# Altium PCB UWB_CAN.PcbDoc
Units mm, origin at the board's own origin, x right, y up, seen from the top; angles counter-clockwise.
Board outline 22.83 x 42.18 mm, 2 copper layers (Component Side, Solder Side), stack 1.071 mm thick; 41 components, 37 nets, 179 pads, 180 vias.
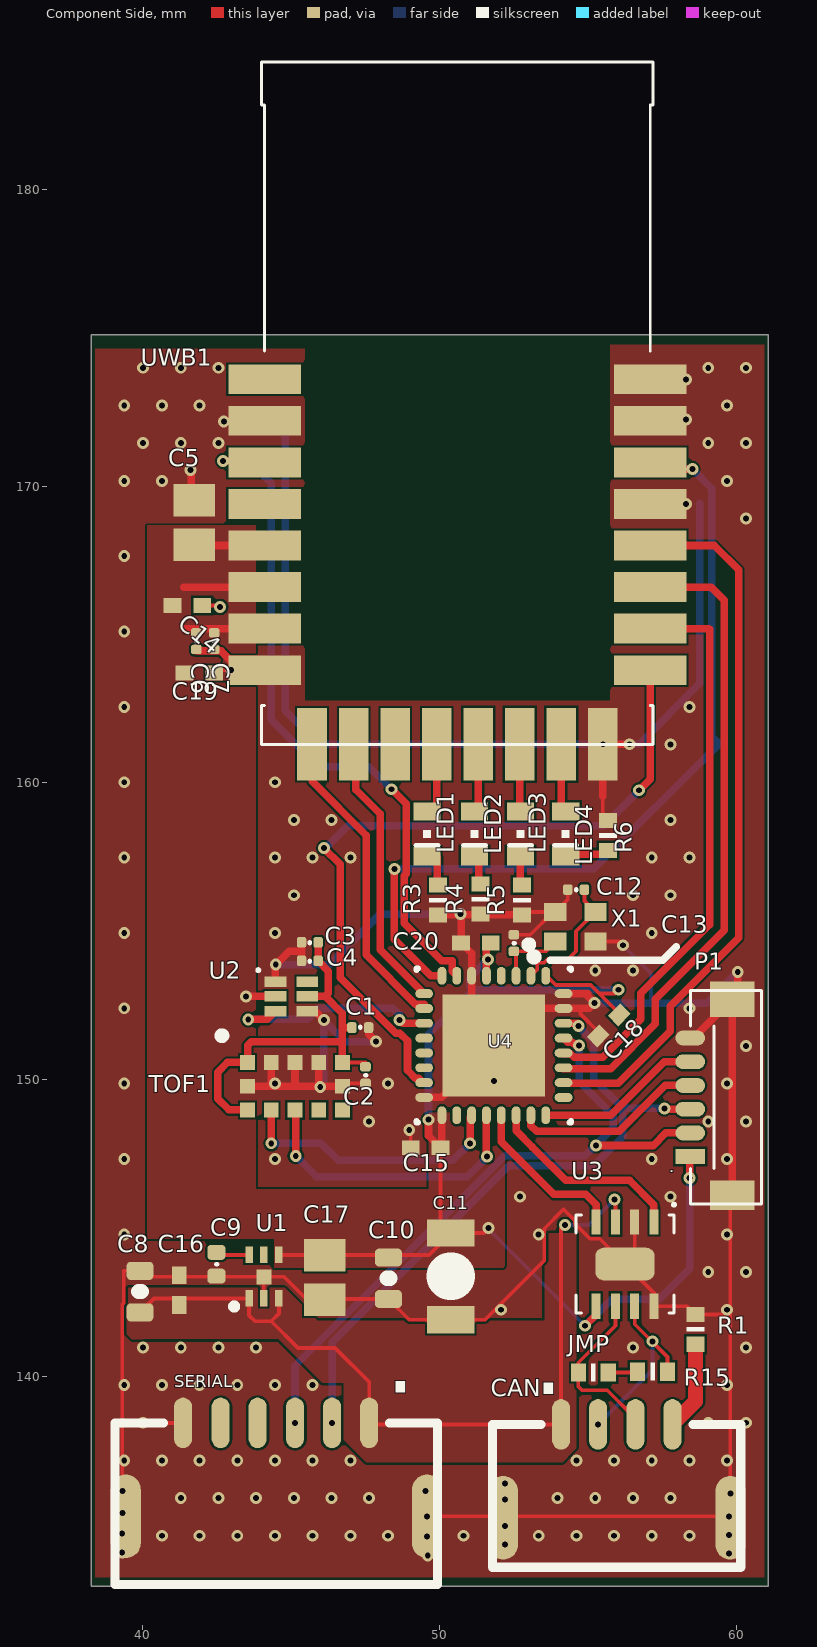
[diagram p0: Component Side view]
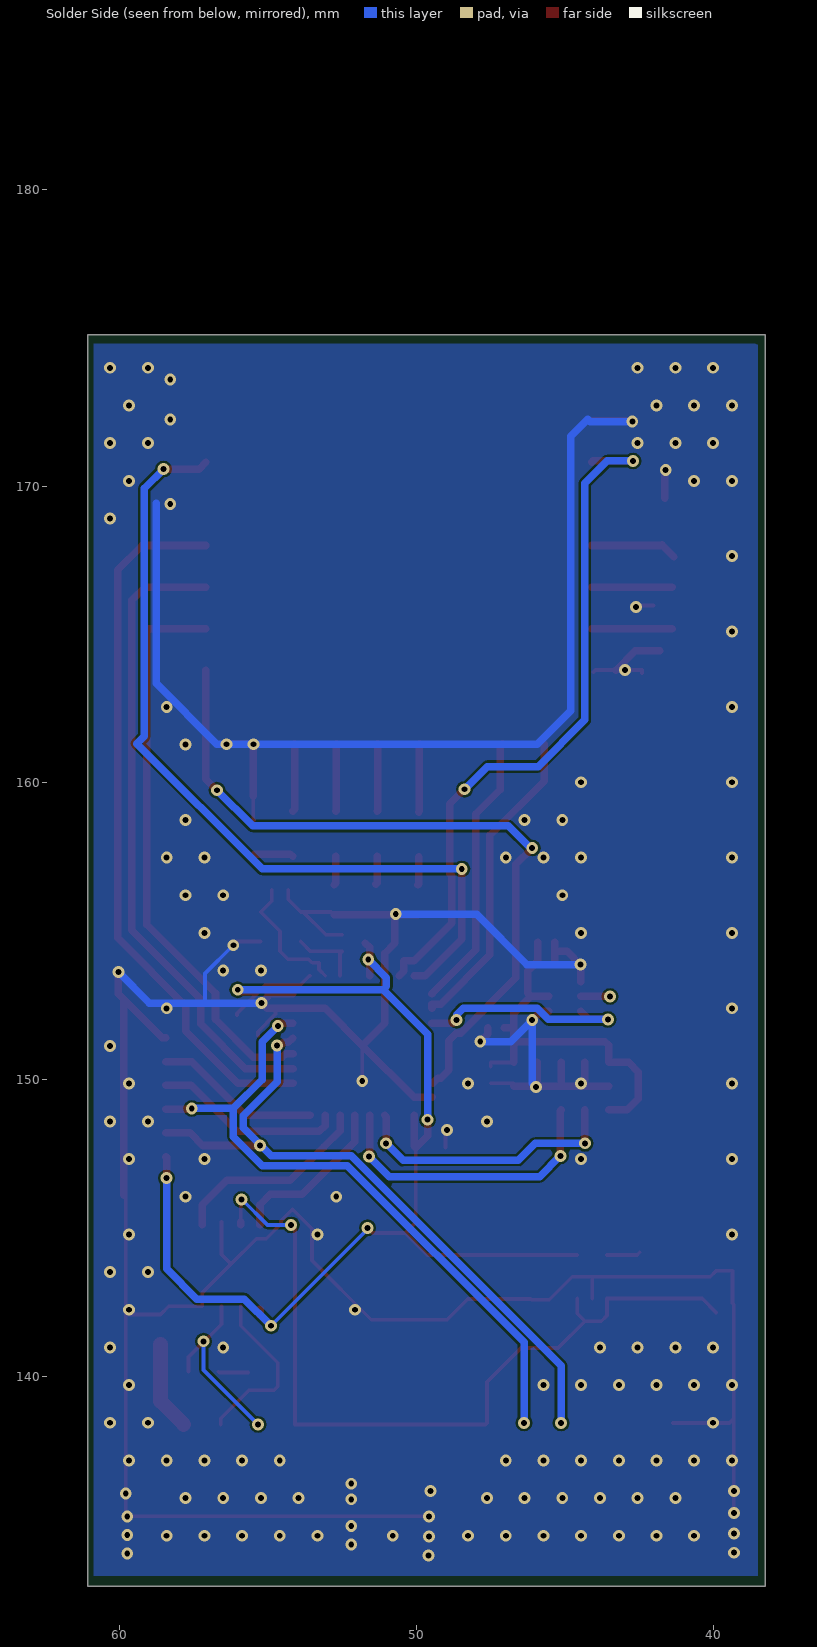
[diagram p1: Solder Side view, seen from below]
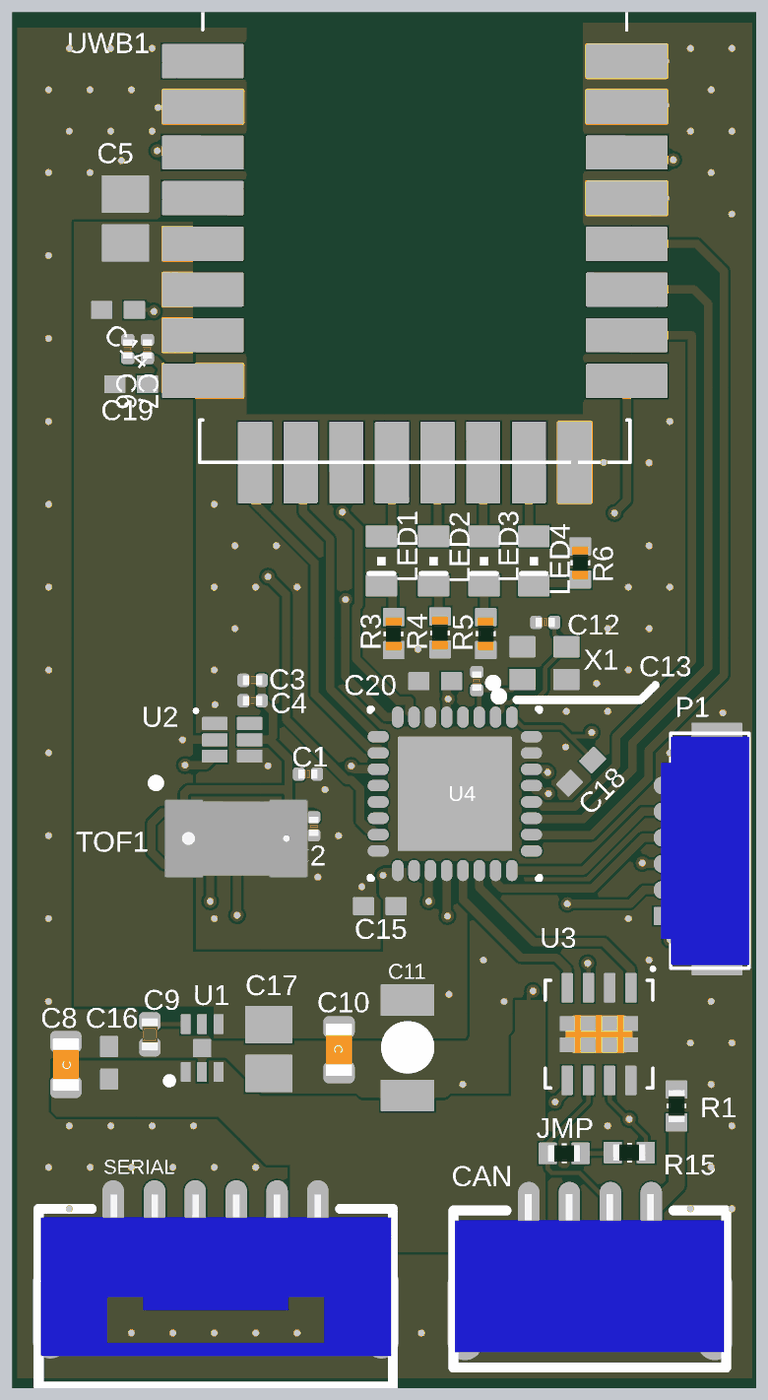
[diagram p2: 3D render of the assembled board from above, using the file's embedded part models]

## Layer stack, top to bottom
Top Solder: solder mask 0.0102, Solder Resist, Dk 3.5
Component Side: signal copper 0.0356
Dielectric 1: core 1, FR-4, Dk 4.2
Solder Side: signal copper 0.0356
Bottom Solder: solder mask 0.0102, Solder Resist, Dk 3.5

## Board outline
38.25,132.925 61.075,132.925 61.075,175.1 38.25,175.1

## Design rules (kind name [scope] priority, off if disabled: settings)
Clearance Clearance_1 [All] p1: gap=0.076 ignorepadtopadclearanceinfootprint=FALSE
Clearance mdPadVia [IsPad vs IsVia] p2 off: gap=0.15 ignorepadtopadclearanceinfootprint=FALSE except(0: Arc-Hole Track-Hole SMDPad-Hole THPad-Hole Via-Hole Fill-Hole Poly-Hole Region-Hole Text-Hole)
ComponentClearance ComponentClearance_1 [All] p1 off: gap=0 collisioncheckmode=3 verticalgap=0 showdistances=FALSE
DiffPairsRouting [All] p1: maxlimit=0.254 minlimit=0.254 mostfreqgap=0.254 toplayer_minwidth=0.15 toplayer_maxwidth=0.381 toplayer_prefwidth=0.15 bottomlayer_minwidth=0.15 bottomlayer_maxwidth=0.381 bottomlayer_prefwidth=0.15 maxuncoupledlength=12.7
HoleToHoleClearance [All] p1: gap=0.203 allowstackedmicrovias=TRUE
MatchedLengths [All] p1 off: tolerance=25.4 checknetsindiffpair=FALSE checkdiffpairvsdiffpair=TRUE checkxsignals=TRUE checkothers=TRUE
MinimumSolderMaskSliver [All] p1 off: minsoldermaskwidth=0.254
PasteMaskExpansion [All] p1: expansion=0.025
PolygonConnect ThermalVias [IsVia] p1: connectstyle=Direct reliefconductorwidth=0.254 reliefentries=4 polygonreliefangle="90 Angle" airgapwidth=0.254
PolygonConnect [All] p2: connectstyle=Direct reliefconductorwidth=0.254 reliefentries=4 polygonreliefangle="90 Angle" airgapwidth=0.254
RoutingVias 1-2 [InDrillLayerPair('Component Side - Signal Layer 1')] p1: holewidth=0.1 width=0.2 viastyle="Through Hole" minholewidth=0.1 minwidth=0.2 maxholewidth=0.1 maxwidth=0.2
RoutingVias 2-3 [InDrillLayerPair('Signal Layer 1 - Signal Layer 2')] p2: holewidth=0.1 width=0.2 viastyle="Through Hole" minholewidth=0.1 minwidth=0.2 maxholewidth=0.1 maxwidth=0.2
RoutingVias 3-4 [InDrillLayerPair('Signal Layer 2 - Solder Side')] p3: holewidth=0.1 width=0.2 viastyle="Through Hole" minholewidth=0.1 minwidth=0.2 maxholewidth=0.1 maxwidth=0.2
RoutingVias 1-4 [InDrillLayerPair('Component Side - Solder Side')] p4: holewidth=0.2 width=0.4 viastyle="Through Hole" minholewidth=0.2 minwidth=0.4 maxholewidth=0.2 maxwidth=0.4
SMDNeckDown SMDNeckDown1V8 [InNet('1V8')] p1 off: percent=70.000
SMDNeckDown SMDNeckDown2V8 [InNet('2V8')] p2 off: percent=70.000
SMDNeckDown 5VNeckdown [All] p3 off: percent=100.000
ShortCircuit normal_no_shorts [InPadClass('All Pads')] p1: allowed=FALSE
SilkToBoardRegionClearance [All] p1 off:
SilkToSilkClearance [All] p1 off: silktosilkclearance=0.254
SilkToSolderMaskClearance [IsPad] p1 off: minsilkscreentomaskgap=0.001 clearancetoexposedcopper=TRUE
SolderMaskExpansion [All] p1: expansion=0.025
Width 2V8 [InNet('1V8')] p1: maxlimit=0.254 minlimit=0.124 preferedwidth=0.254
Width 5V [InNet('Net3_1')] p2: maxlimit=0.254 minlimit=0.087 preferedwidth=0.254
Width 1V8 [InNet('2V8')] p3: maxlimit=0.254 minlimit=0.124 preferedwidth=0.254
Width [All] p4: maxlimit=0.5 minlimit=0.127 preferedwidth=0.254
21 further rules are at their usual default settings.

## Classes and differential pairs
component class U_UWB_F3_MCU: C1_2 C2_2 C3_2 C12 C13 C14 C15 C17 C18 C19 C20 ICM-1_2 P1 U4 X1
component class U_OMD_TOF: C1 C2 C3 C4 TOF1 U2
component class U_OMD_UWB: C5 C6 C7 LED1 LED2 LED3 LED4 R3 R4 R5 R6 UWB1
component class UWB_F3_CAN_UWB_layout: SERIAL
component class U_UWB_5V-3V3_LDO: C8 C9 C10 C11 U1
component class U_OMD_CAN: C16 CAN JMP R1 R15 U3

## Components (designator, comment, footprint, x,y, rotation, side; value= is the part's Value field where it differs from the comment)
C1 "22uF" 0201-cap 47.325,151.75 r0 top
C2 "4u7" 0201-cap 47.5,150.15 r270 top
C3 "1u" 0201-cap 45.625,154.625 r180 top
C4 "0u1" 0201-cap 45.625,154 r180 top
C5 "GRM21BR60G107ME15L" C0805 41.725,168.775 r270 top value=100uF
C6 "1u" 0201-cap 41.8,164.775 r270 top
C7 "0u1" 0201-cap 42.4,164.775 r270 top
C8 "1u" 0603-CAP 39.9,142.85 r90 top
C9 "0.1u" 0402-CAP 42.475,143.775 r270 top
C10 "1u" 0603-CAP 48.275,143.3 r270 top
C11 "100u" 1206-CAP 50.375,143.375 r270 top
C12 "8p" 0201-cap 54.6,156.4 r180 top
C13 "8p" 0201-cap 52.5,154.6 r270 top
C14 "CAP CER 10000PF 50V X7R 0402" CAPC1005L 41.5,165.975 r180 top value=10nF
C15 "Cap" CAPC1005L 49.525,147.7 r180 top value=1uF
C16 "Cap" CAPC1005L 41.225,142.9 r270 top value=1uF
C17 "Cap" CAPC2012L 46.125,143.325 r90 top value=22uF
C18 "CAP CER 10000PF 50V X7R 0402" CAPC1005L 55.7,151.825 r45 top value=10nF
C19 "CAP CER 10000PF 50V X7R 0402" CAPC1005L 41.9,163.7 r180 top value=10nF
C20 "CAP CER 10000PF 50V X7R 0402" CAPC1005L 51.225,154.6 r0 top value=10nF
CAN "JST_GH_H4" JST_GH_H4 55.975,132.925 r180 top
JMP "solder" R0402 55.175,140.125 r0 top
LED1 "AMBER" 0603-LED 49.575,158.275 r90 top
LED2 "AMBER" 0603-LED 51.175,158.275 r90 top
LED3 "AMBER" 0603-LED 52.725,158.275 r90 top
LED4 "AMBER" 0603-LED 54.25,158.275 r90 top
P1 "JST_SUR_6" JST_SUR_H6 60.45,149.4 r90 top
R1 "RES SMD 120 OHM 5% 1/16W 0402" R0402 58.625,141.575 r90 top value=120R
R3 "220R" 0402-RES 49.95,156.05 r90 top
R4 "220R" 0402-RES 51.375,156.075 r90 top
R5 "220R" 0402-RES 52.775,156.05 r90 top
R6 "220R" 0402-RES 55.675,158.225 r270 top
R15 "RES SMD 120 OHM 5% 1/16W 0402" R0402 57.175,140.15 r0 top value=120R
SERIAL "JST_GH_V6" JST_GH_V6 44.5,132.975 r180 top
TOF1 "VL53L0X" VL53L0X 45.125,149.775 r180 top
U1 "MIC5353" MLF-6-1.6MM 44.075,143.35 r0 top
U2 "NCV8154" NCV8154 45,152.8 r0 top
U3 "CAN" SON65P300X100_HS-9N 56.25,143.78 r270 top
U4 "IC MCU M4 64KB FLASH 32UFQFPN" QFN50P500X500X60-32L 51.828,151.145 r270 top
UWB1 "DWM1000" DWM1000 50.6,172.8 r0 top
X1 "Crystal Oscillator in SMD 1.6 x 1.2" OSCILLATOR-1.6x1.2 54.575,155.15 r0 top

## Footprints (in the part's own frame and the unit in brackets; to place one, negate y for a bottom-side part, rotate by r counter-clockwise, add the part's x,y. Pads: shape width x height; smd on the part's side, far side on the other; paste and mask are expansions set on the pad)
0201-cap [mm]
  rrect50% 0.32x0.36 smd mask+0: 1(-0.28,0) 2(0.28,0)
  silkscreen extent 0,-0.01 0,0.03, body extent -0.3,-0.15 0.3,0.15, height 0.3
0402-CAP [mil]
  rrect50% 20x24 smd mask+0: 1(-15.75,0) 2(15.75,0)
  silkscreen extent 0,0 0,1, body extent -20,-10 20,10, height 20
0402-RES [mil] "0402-RES"
  rect 20x24 smd: 1(-19.68,0) 2(20,0)
  silkscreen extent -3,-12 3,12, body extent -20,-10 20,10, height 20
0603-CAP [mil] "0603-CAP"
  rrect50% 24x36 smd mask+0: 1(-27.56,0) 2(27.56,0)
  silkscreen extent 0,-2 0,2, body extent -31,-16 31,16, height 34
0603-LED [mil]
  rect 24x36 smd: A(30,0) C(-29.53,0)
  silkscreen extent -15,-15 5,15
1206-CAP [mil] "1206-CAP"
  rect 36x63 smd: 1(-57.09,0) 2(58,0)
  silkscreen extent 0,0 0,1
C0805 [mm] "Chip Capacitor, Body 2.0x1.3mm, IPC High Density"
  rect 1.1x1.4 smd: 1(-0.75,0) 2(0.75,0)
  body extent -1.1,-0.72 1.1,0.72, height 1.4
CAPC1005L [mm] "Chip Capacitor, Body 1.0x0.5mm, IPC High Density"
  rect 0.6x0.5 smd: 1(-0.5,0) 2(0.5,0)
  body extent -0.55,-0.3 0.55,0.3, height 0.6
CAPC2012L [mm] "Chip Capacitor, Body 2.0x1.3mm, IPC High Density"
  rect 1.1x1.4 smd: 1(-0.75,0) 2(0.75,0)
  body extent -1.1,-0.73 1.1,0.73, height 1.1
DWM1000 [mm] "DWM1000"
  rect 2.45x1 smd mask+0.05: 1(-6.5,0.8) 2(-6.5,-0.6) 3(-6.5,-2) 4(-6.5,-3.4) 5(-6.5,-4.8) 6(-6.5,-6.2) 7(-6.5,-7.6) 8(-6.5,-9) 17(6.5,-9) 18(6.5,-7.6) 19(6.5,-6.2) 20(6.5,-4.8) 21(6.5,-3.4) 22(6.5,-2) 23(6.5,-0.6) 24(6.5,0.8)
  rect 1x2.45 smd mask+0.05: 9(-4.9,-11.5) 10(-3.5,-11.5) 11(-2.1,-11.5) 12(-0.7,-11.5) 13(0.7,-11.5) 14(2.1,-11.5) 15(3.5,-11.5) 16(4.9,-11.5)
  silkscreen extent -6.6,-11.5 6.6,11.5
JST_GH_H4 [mil]
  rrect100% 24x67 smd: 1(74,-214.57) 2(25,-214.57) 3(-24.61,-214.57) 4(-73.82,-214.57)
  rrect100% 40x111 smd: GND(-150.59,-90.55) GND(151,-90.55)
  silkscreen extent -164,-215 165,-25, body extent -162,-234 163,-43, height 170
JST_GH_V6 [mil]
  rrect100% 24x67 smd: 1(-123.03,-214.57) 2(-73.82,-214.57) 3(-24.61,-214.57) 4(25,-214.57) 5(74,-214.57) 6(124,-214.57)
  rrect100% 40x111 smd: GND(-199.8,-90.55) GND(200,-90.55)
  silkscreen extent -214,-215 214,0, body extent -212,-232 212,-37, height 165
JST_SUR_H6 [mm]
  rect 0.5x1 smd: 1(-2,2)
  rrect100% 0.5x1 smd: 2(-1.2,2) 3(-0.4,2) 4(0.4,2) 5(1.2,2) 6(2,2)
  rect 1x1.5 smd: GND(-3.3,0.585)
  rect 1.2x1.5 smd: GND(3.3,0.585)
  silkscreen extent -3.6,-0.4 3.6,2, body extent -3.5,-0.4 3.5,2.3, height 1.7
MLF-6-1.6MM [mil] "MLF-6-1.6MM"
  rect 10x22 smd: 1(-19.69,-28.74) 2(0,-28.74) 3(20,-28.74) 4(20,29) 5(0,29) 6(-19.68,29)
  rect 20x20 smd: 2(0,0)
  silkscreen extent -41,-41 -37,-37
NCV8154 [mm] "ldo 1.8v 2.8v"
  rect 0.73x0.35 smd: 1(-0.535,0.5) 2(-0.535,0) 3(-0.535,-0.5) 4(0.535,-0.5) 5(0.535,0) 6(0.535,0.5)
  silkscreen extent -1.16,0.84 -1.06,0.94
OSCILLATOR-1.6x1.2 [mm] "OSCILLATOR-1.6x1.2"
  rect 0.75x0.6 smd: 1(-0.675,-0.5) 2(0.675,-0.5) 3(0.675,0.5) 4(-0.675,0.5)
  silkscreen extent -1.5,-1.12 -1.3,-0.91
QFN50P500X500X60-32L [mm] "QFN, 32-Leads, Body 5.2x5.2mm (max), Pitch 0.50mm, IPC High Density"
  oval 0.6x0.3 smd: 1(-2.35,1.75) 2(-2.35,1.25) 3(-2.35,0.75) 4(-2.35,0.25) 5(-2.35,-0.25) 6(-2.35,-0.75) 7(-2.35,-1.25) 8(-2.35,-1.75) 17(2.35,-1.75) 18(2.35,-1.25) 19(2.35,-0.75) 20(2.35,-0.25) 21(2.35,0.25) 22(2.35,0.75) 23(2.35,1.25) 24(2.35,1.75)
  oval 0.3x0.6 smd: 9(-1.75,-2.35) 10(-1.25,-2.35) 11(-0.75,-2.35) 12(-0.25,-2.35) 13(0.25,-2.35) 14(0.75,-2.35) 15(1.25,-2.35) 16(1.75,-2.35) 25(1.75,2.35) 26(1.25,2.35) 27(0.75,2.35) 28(0.25,2.35) 29(-0.25,2.35) 30(-0.75,2.35) 31(-1.25,2.35) 32(-1.75,2.35)
  rect 3.45x3.45 smd: 33(0,0)
  silkscreen extent -3.52,-2.6 2.6,2.6, body extent -2.58,-2.57 2.57,2.58, height 0.6
R0402 [mil]
  rect 20x24 smd: 1(-19.69,0) 2(20,0)
  silkscreen extent -3,-12 3,12, body extent -20,-10 20,10, height 12
SON65P300X100_HS-9N [mm] "SON, 8-Leads, Body 3.00x3.00mm, Pitch 0.65mm, Thermal Pad 2.40x1.59mm, IPC Medium Density"
  rect 0.85x0.3 smd: 1(-1.42,0.975) 2(-1.42,0.325) 3(-1.42,-0.325) 4(-1.42,-0.975) 5(1.42,-0.975) 6(1.42,-0.325) 7(1.42,0.325) 8(1.42,0.975)
  rrect50% 1.1x2 smd paste-0.795: 2(0,0)
  silkscreen extent -2.05,-1.65 1.65,1.7, body extent -1.55,-1.55 1.55,1.55, height 1
VL53L0X [mm] "LIDAR"
  rect 0.5x0.5 smd: 1(1.6,-0.8) 2(0.8,-0.8) 3(0,-0.8) 4(-0.8,-0.8) 5(-1.6,-0.8) 6(-1.6,0) 7(-1.6,0.8) 8(-0.8,0.8) 9(0,0.8) 10(0.8,0.8) 11(1.6,0.8) 12(1.6,0)
  silkscreen extent 2.34,-1.83 2.59,-1.58, body extent -2.2,-1.2 2.2,1.2, height 1

## Part data
C1: library part CAP0805, "CAP CER 22UF 6.3V X5R 0402", Supplier Part Number 1=478-9839-2-ND, Supplier 1=Digi-Key
C2: library part CAP0603, "CAP CER 4.7UF 6.3V X5R 0201", Supplier Part Number 1=490-13230-2-ND, Supplier 1=Digi-Key
C3 C6: library part CAP0603, "CAP CER 1UF 6.3V X5R 0201", Supplier Part Number 1=490-7229-2-ND, Supplier 1=Digi-Key
C4 C7: library part CAP0402, "CAP CER 0.1UF 16V Y5V 0402", Supplier Part Number 1=490-10404-2-ND, Supplier 1=Digi-Key
C5: library part Capacitor, Supplier Part Number 1=490-10510-1-ND, Supplier 1=Digi-Key
C8 C10: library part CAPACITOR-0603, PARTNO=LMK107B7105KA-T, Supplier Part Number 1=587-3766-1-ND, DOC_NUM=1, REV=X2, Supplier 1=Digi-Key, YEAR=2014
C9: library part CAPACITOR-0402, PARTNO=LMK105BJ104KV-F, Supplier Part Number 1=311-1047-2-ND, DOC_NUM=1, REV=X2, Supplier 1=Digi-Key, YEAR=2014
C11: library part CAPACITOR-1206, PARTNO=C3216X5R1A107M160AC, Supplier Part Number 1=445-6007-2-ND, DOC_NUM=1, REV=X2, Supplier 1=Digi-Key, YEAR=2014
C12 C13: library part CAP0402, "CAP CER 8PF 50V NP0 0201", Supplier Part Number 1=490-13331-1-ND, Supplier 1=Digi-Key
C14 C18 C19 C20: library part Cap, Supplier Part Number 1=445-6893-1-ND, Supplier 1=Digi-Key
C15 C16: "CAP CER 1UF 6.3V X5R 0402", Supplier Part Number 1=587-3766-1-ND, Supplier 1=Digi-Key
C17: "Capacitor", Supplier Part Number 1=587-3391-1-ND, Supplier 1=Digi-Key
CAN: "SM04B-GHS-TB", Supplier Part Number 1=455-1566-2-ND, Supplier 1=Digi-Key
JMP: library part Resistor
LED1 LED2 LED3 LED4: library part LED0603, "LED 1.6X0.8 DOME ORN CLEAR SMD", Supplier Part Number 1=754-1802-1-ND, Supplier 1=Digi-Key
P1: "Connector, Header, 6Pos, .8mm IDC, R/A, SMD, Tin", Supplier Part Number 1=SM06B-SURS-TF(LF)(SN)-ND, Supplier 1=Digi-Key
R1 R15: library part Resistor, Supplier Part Number 1=311-120JRTR-ND, Supplier 1=Digi-Key
R3 R4 R5 R6: library part RESISTOR0402-RES, "RES 220 OHM 1/16W 1% 0402 SMD", Supplier Part Number 1=311-220LRCT-ND, Supplier 1=Digi-Key
SERIAL: "BM06B-GHS-TBT", Supplier Part Number 1=455-1582-2-ND, Supplier 1=Digi-Key
TOF1: Supplier Part Number 1=497-16538-2-ND, Supplier 1=Digi-Key
U1: "MIC5353 - 500mA LDO in 1.6mm × 1.6mm Package   The MIC5353 is a high-performance, single-output, ultra- low LDO (ULDOTM) regulator, offering a low total output noise of 30µVRMS. The MIC5353 is capable of sourcing 500mA output current and offers high-PSRR and low- output noise, making it an ideal solution for RF applications.   The MIC5353 provides 2% accuracy, extremely low dropout voltage (160mV @ 500mA), and low ground current (typically 90µA) making it ideal for battery-operated applications. When disabled, the MIC5353 enters a zero- off-mode current state, thereby drawing almost no current.   The MIC5353 is available in the 1.6mm x 1.6mm Thin MLF® package, occupying only 2.56mm2 of PCB area, a 36% reduction in board area compared to SC-70 and 2mm x 2mm Thin MLF® packages.", Supplier Part Number 1=576-3680-1-ND, Supplier 1=Digi-Key
U2: "IC REG LDO 1.8v and 2.8v", Supplier Part Number 1=NCV8154MTW180280TCGOSTR-ND, Supplier 1=Digi-Key
U3: Supplier Part Number 1=568-8686-2-ND, Supplier 1=Digi-Key
U4: library part STM32F302K8U6, "72 MHz Cortex-M4F MCU with 16 KB RAM, 64 KB flash", Supplier Part Number 1=41Y5840, Supplier 1=Newark
UWB1: Supplier Part Number 1=1479-1002-2-ND, Supplier 1=Digi-Key
X1: library part OSCILLATOR-3.2X2.5, "CRYSTAL 24MHZ 8PF SMD", Supplier Part Number 1=887-1846-2-ND, Supplier 1=Digi-Key

## Via types
v1: diameter 0.4, hole 0.2, Component Side to Solder Side, tented both sides, 180 vias

## Nets (pads, with @x,y where several pads share a name; then routed paths per layer and width w, separated by ;. In a path a pad name is that pad's centre, name@x,y a point inside that pad or via, vN(x,y) a via of type N, cw(c..) or ccw(c..) an arc to the next point about the centre after c; other vN are vias at no path point)
GND_MCU: C1.2 C2.2 C3.2 C4.2 C5.1 C6.2 C7.2 C8.2 C9.2 C10.2 C11.2 C12.2 C13.1 C14.1 C15.2 C16.1 C17.1 C18.1 C19.1 C20.1 CAN.GND P1.6 P1.GND R1.2 R3.1 R4.1 R5.1 R6.1 SERIAL.6 SERIAL.GND TOF1.2 TOF1.3 TOF1.4 TOF1.6 TOF1.12 U1.2 U2.1 U2.4 U3.2 U3.8 U4.6 U4.16 U4.31 U4.32 U4.33 UWB1.2 UWB1.8 UWB1.16 UWB1.21 UWB1.23 UWB1.24 X1.2 X1.4 | length 164.5
  Component Side w0.127: SERIAL.GND@39.42,135.275 v1(39.303,135.392) v1(39.303,136.125) 39.303,138.575 ; SERIAL.6 39.453,138.425 39.303,138.575 ; C14.1 42.6,165.975 v1(42.6,165.925) ; C19.1 42.4,163.8 v1(42.975,163.8) 43.275,163.8 43.966,163.8 UWB1.8@44.033,163.733 ; U1.2@44.075,142.62 U1.2@44.075,143.35 ; TOF1.6 46.725,149.87 C2.2 ; v1(48.975,148.3) 49.025,148.3 C15.2 ; v1(49.575,135.275) v1(59.75,135.275) 59.8,135.225 v1(59.8,136.05) v1@59.8,142.1 ; v1(51.828,149.95) U4.33 ; C13.1 53.055,154.88 X1.4@53.825,155.65 ; R5.1 52.875,155.65 X1.4@53.825,155.65 ; C12.2 54.32,156.07 X1.4 X1.4@53.825,155.65 ; 54.75,152.395 54.75,152.205 55.346,151.609 C18.1 ; X1.2 56.05,154.65 v1(56.175,154.525) ; R6.1@55.475,158.75 55.5,158.775 55.5,159.55 ; U3.2@56.575,145.2 56.575,144.105 U3.2@56.25,143.78 ; P1.GND@59.865,146.1 59.8,146.035 v1@59.8,142.1 ; 39.303,138.575 39.303,142.423 39.35,142.47 39.35,143.55 C8.2 40.1,143.35 U1.2@44.075,143.35 ; U1.2@44.075,143.35 44.75,143.35 45.525,142.575 C17.1 46.15,142.6 C10.2 48.973,141.902 C11.2 51.527,141.902 53.525,143.9 53.525,144.97 54.18,145.625 54.565,145.241 54.565,145.138 55.067,144.635 55.395,144.635 U3.2@56.25,143.78 ; U3.2@56.25,143.78 57.225,142.805 U3.8 58.348,142.36 R1.2 59.783,142.083 v1@59.8,142.1
  Component Side w0.254: C5.1@41.625,169.6 v1@41.625,170.55 ; C6.2@41.8,164.445 42.63,164.445 UWB1.8@43.275,163.8 ; v1@42.725,172.2 UWB1.2 ; 44,149.775 TOF1.12 45.1,149.775 ; v1@44.325,149.8 TOF1.2 ; U2.1 44.465,153.865 v1(44.475,153.875) 44.925,154.325 45.345,154.325 ; TOF1.3 45.125,149.8 45.1,149.775 ; C4.2 45.345,154.325 ; C3.2 45.345,154.325 ; U2.4 45.8,152.3 v1(46.1,152) ; TOF1.4 45.925,149.775 45.1,149.775 ; v1@45.975,149.775 TOF1.6 ; C1.2 47.605,151.52 v1(47.85,151.275) ; U4.16 50.078,149.395 U4.33 ; R3.1 R5.1 ; v1@50.725,155.525 C20.1 51.078,154.247 U4.6 51.078,151.895 U4.33 ; U4.32 54.995,152.895 54.995,152.805 v1(55.225,152.575) 55.045,152.395 54.75,152.395 U4.31 53.078,152.395 U4.33 ; 55.5,159.55 v1(55.5,161.3) v1(56.4,161.3) ; UWB1.23@58.225,172.25 v1(58.3,172.25) ; P1.6 58.565,151.4 P1.GND@59.865,152.7 ; P1.GND@59.865,146.1 P1.GND@59.865,152.7 ; v1(60.05,153.625) 60.05,152.885 P1.GND@59.865,152.7
  Solder Side w0.127: v1(56.175,154.525) 57.125,153.575 57.125,152.575
  Solder Side w0.254: v1(42.725,172.175) 44.15,172.175 44.225,172.25 44.8,171.675 44.8,162.425 45.925,161.3 v1(55.5,161.3) v1(56.4,161.3) 56.725,161.3 58.775,163.35 58.775,169.425 ; v1(44.475,153.875) 46.275,153.875 47.975,155.575 v1(50.7,155.575) ; v1(45.975,149.75) 46.1,149.875 v1(46.1,152) 46.825,151.275 v1(47.85,151.275) ; v1(55.225,152.575) 57.125,152.575 59,152.575 v1(60.05,153.625)
  other v1: 49.6,133.95 59.75,134.025 39.3,134.05 52.2,134.325 49.575,134.6 40.64,134.62 41.91,134.62 43.18,134.62 44.45,134.62 45.72,134.62 46.99,134.62 48.26,134.62 50.8,134.62 53.34,134.62 54.61,134.62 55.88,134.62 57.15,134.62 58.42,134.62 59.75,134.65 39.3,134.7 52.2,134.95 52.2,135.85 41.275,135.89 42.545,135.89 43.815,135.89 45.085,135.89 46.355,135.89 47.625,135.89 53.975,135.89 55.245,135.89 56.515,135.89 57.785,135.89 49.525,136.125 52.2,136.375 39.37,137.16 40.64,137.16 41.91,137.16 43.18,137.16 44.45,137.16 45.72,137.16 46.99,137.16 54.61,137.16 55.88,137.16 57.15,137.16 58.42,137.16 59.69,137.16 40.005,138.43 59.055,138.43 60.325,138.43 39.37,139.7 40.64,139.7 41.91,139.7 43.18,139.7 44.45,139.7 45.72,139.7 59.69,139.7 40.005,140.97 41.275,140.97 42.545,140.97 43.815,140.97 56.515,140.97 60.325,140.97 52.07,142.24 59.69,142.24 59.055,143.51 60.325,143.51 39.37,144.78 53.34,144.78 59.69,144.78 52.705,146.05 57.785,146.05 39.37,147.32 44.45,147.32 57.15,147.32 59.69,147.32 47.625,148.59 59.055,148.59 60.325,148.59 39.37,149.86 44.45,149.86 48.26,149.86 59.69,149.86 60.325,151.13 39.37,152.4 58.42,152.4 55.245,153.67 56.515,153.67 39.37,154.94 44.45,154.94 57.15,154.94 45.085,156.21 56.515,156.21 57.785,156.21 39.37,157.48 44.45,157.48 45.72,157.48 46.99,157.48 57.15,157.48 58.42,157.48 45.085,158.75 46.355,158.75 57.785,158.75 39.37,160.02 44.45,160.02 57.785,161.29 39.37,162.56 58.42,162.56 39.37,165.1 39.37,167.64 60.325,168.91 58.3,169.4 39.37,170.18 40.64,170.18 59.69,170.18 41.6,170.55 40.005,171.45 41.275,171.45 42.545,171.45 59.055,171.45 60.325,171.45 39.37,172.72 40.64,172.72 41.91,172.72 59.69,172.72 58.3,173.6 40.005,173.99 41.275,173.99 42.545,173.99 59.055,173.99 60.325,173.99
I2C2_SCL: TOF1.10 U4.19 | length 9.3
  Component Side w0.254: v1(44.325,147.85) 44.325,147.875 TOF1.10 ; v1(51.025,147.85) 51.025,148.742 U4.19
  Solder Side w0.254: v1(44.325,147.85) 46,147.85 46.575,147.275 50.45,147.275 v1(51.025,147.85)
I2C2_SDA: TOF1.9 U4.20 | length 10
  Component Side w0.254: TOF1.9 45.15,148.95 v1(45.15,147.425) ; U4.20 51.578,147.422 v1(51.6,147.4)
  Solder Side w0.254: v1(45.15,147.425) 45.85,146.725 50.925,146.725 v1(51.6,147.4)
NetC1_1: C1.1 C2.1 C3.1 C4.1 TOF1.1 TOF1.5 TOF1.11 U2.5 | length 13.4
  Component Side w0.127: TOF1.5 47.5,150.575 C2.1
  Component Side w0.254: TOF1.11 42.9,148.975 42.525,149.35 42.525,150.25 42.85,150.575 TOF1.1 43.525,151.15 43.65,151.275 46.625,151.275 46.725,151.175 ; U2.5 46.15,152.8 ; C3.1 C4.1 46.25,153.655 46.25,152.9 46.15,152.8 ; TOF1.5 46.725,151.175 ; C1.1 46.775,151.75 46.725,151.7 ; 46.15,152.8 46.725,152.225 46.725,151.7 ; 46.725,151.175 46.725,151.7
NetC8_1: C8.1 C16.2 CAN.1 SERIAL.1 U1.1 U1.3 U3.3 | length 27.8
  Component Side w0.127: C8.1 40.37,142.62 U1.1 43.575,142.05 43.775,141.85 44.325,141.85 ; U1.3 44.583,142.108 44.325,141.85 ; v1(54.225,145.1) 54.095,144.97 CAN.1 47.675,138.375 SERIAL.1 47.625,139.8 46.475,140.95 45.225,140.95 44.325,141.85 ; v1(55.9,145.95) 55.925,145.925 U3.3
  Component Side w0.254: U3.3@55.925,145.1 U3.3
  Solder Side w0.127: v1(54.225,145.1) 55.025,145.1 55.875,145.95 v1(55.9,145.95)
NetC9_1: C9.1 U1.6 | length 1.1
  Component Side w0.127: C9.1 42.563,144.087 U1.6
NetCAN_2: CAN.2 R15.2 U3.7 | length 6.2
  Component Side w0.127: U3.7 56.575,141.75 57.683,140.642 R15.2
  Solder Side w0.127: v1(55.34,138.375) 57.175,140.21 v1(57.175,141.175)
NetCAN_3: CAN.3 JMP.1 U3.6 | length 5.8
  Component Side w0.127: U3.6 55.925,141.7 54.675,140.45 JMP.1 54.675,139.65 54.8,139.525 55.65,139.525 56.6,138.575 CAN.3
NetCAN_4: CAN.4 R1.1 | length 3
  Component Side w0.5: CAN.4 58.625,139.15 R1.1
NetJMP_2: JMP.2 R15.1 | length 1
  Component Side w0.127: JMP.2 56.65,140.125 R15.1
NetLED1_A: LED1.A UWB1.12 | length 2.3
  Component Side w0.254: UWB1.12 49.9,159.037 LED1.A@49.925,159.012
NetLED1_C: LED1.C R3.2 | length 1
  Component Side w0.254: LED1.C@49.925,157.5 49.925,156.583 R3.2
NetLED2_A: LED2.A UWB1.13 | length 2.3
  Component Side w0.254: UWB1.13 51.3,159.062 LED2.A@51.325,159.037
NetLED2_C: LED2.C R4.2 | length 1
  Component Side w0.254: LED2.C@51.325,157.525 51.325,156.633 R4.2
NetLED3_A: LED3.A UWB1.14 | length 2.3
  Component Side w0.254: UWB1.14 52.7,159.062 LED3.A
NetLED3_C: LED3.C R5.2 | length 1
  Component Side w0.254: LED3.C 52.725,156.608 R5.2
NetLED4_A: LED4.A UWB1.15 | length 2.3
  Component Side w0.254: UWB1.15 54.1,159.112 LED4.A@54.175,159.037
NetLED4_C: LED4.C R6.2 | length 1.3
  Component Side w0.254: LED4.C@54.175,157.525 54.25,157.6 R6.2@55.45,157.6
NetU2_3: U2.3 U4.11 | length 7.4
  Component Side w0.254: v1(43.55,152.025) 44.19,152.025 U2.3 ; v1(48.65,152) 48.755,151.895 U4.11
  Solder Side w0.254: v1(43.55,152.025) 45.555,152.025 45.933,152.403 48.422,152.403 48.65,152.175 v1(48.65,152)
NetU3_1: U3.1 U4.22 | length 6.9
  Component Side w0.254: U4.22 52.578,148.272 53.125,147.725 54.25,146.6 56.4,146.6 57.225,145.775 U3.1 U3.1@57.225,145.1
NetU3_4: U3.4 U4.21 | length 5.6
  Component Side w0.254: U4.21 52.078,147.897 53.85,146.125 54.925,146.125 55.275,145.775 U3.4 U3.4@55.275,145.1
NetU4_8: U4.8 UWB1.22 | length 28.3
  Component Side w0.254: v1(48.475,157.1) 48.475,154.725 49.705,153.495 U4.8 ; UWB1.22 57.325,170.575 v1(58.525,170.575)
  Solder Side w0.254: v1(48.475,157.1) 55.2,157.1 59.425,161.325 59.178,161.572 59.178,169.922 v1(58.525,170.575)
NetU4_9: U4.9 UWB1.10 | length 9.4
  Component Side w0.254: UWB1.10 47.175,161.225 47.175,159.775 48,158.95 48,154.373 U4.9
NetU4_10: U4.10 UWB1.9 | length 10.6
  Component Side w0.254: UWB1.9 45.7,160.05 47.525,158.225 47.525,154.198 49.181,152.542 49.478,152.542 U4.10
OSC_IN: C12.1 U4.2 X1.3 | length 4.5
  Component Side w0.127: U4.2 53.288,153.705 53.288,153.935 53.517,153.935 53.633,154.05 54.325,154.05 54.6,154.325 54.6,155 X1.3 54.88,156.02 C12.1
OSC_OUT: C13.2 U4.3 X1.1 | length 2.4
  Component Side w0.127: U4.3 52.578,154.242 C13.2 53.57,154.32 X1.1
R\S\T\: U4.4
RSTn: U4.7 UWB1.3 | length 23.8
  Component Side w0.254: v1(42.7,170.85) 44.05,170.85 UWB1.3 ; v1(48.377,159.783) 48.392,159.783 48.878,159.297 48.878,156.933 48.805,156.86 48.805,155.267 50.074,153.998 50.431,153.998 50.431,153.642 U4.7
  Solder Side w0.254: v1(42.7,170.85) 43.575,170.85 44.325,170.1 44.325,162.125 45.9,160.55 47.61,160.55 v1(48.377,159.783)
SPI3_CS: U4.15 UWB1.17 | length 25.1
  Component Side w0.254: v1(46.1,157.8) 46.65,157.25 46.65,153.43 48.515,151.565 48.66,151.565 48.917,151.308 48.917,150.306 49.181,150.042 49.291,150.042 49.458,149.875 U4.15 ; v1(56.725,159.75) 57.1,160.125 UWB1.17
  Solder Side w0.254: v1@46.125,157.775 46.9,158.55 55.525,158.55 v1(56.725,159.75)
SPI3_MISO: U4.27 UWB1.19 | length 21.7
  Component Side w0.254: U4.27@54.153,150.37 55.77,150.37 57.275,151.875 57.275,152.7 59.6,155.025 59.6,166.15 59.15,166.6 UWB1.19
SPI3_MOSI: U4.28 UWB1.18 | length 19.3
  Component Side w0.254: U4.28@54.153,150.87 54.41,150.87 54.533,150.747 55.497,150.747 56.775,152.025 56.775,152.9 59.1,155.225 59.1,165.175 59.075,165.2 UWB1.18
SPI3_SCK: U4.26 UWB1.20 | length 24.2
  Component Side w0.254: U4.26@54.153,149.87 56.02,149.87 57.775,151.625 57.775,152.475 60.075,154.775 60.075,167.175 59.25,168 UWB1.20
SWCLK: P1.5 U4.24 | length 5.6
  Component Side w0.254: U4.24 55.77,148.795 57.575,150.6 P1.5
SWDIO: P1.4 U4.23 | length 6.4
  Component Side w0.254: U4.23 53.078,148.447 53.275,148.25 56.05,148.25 57.6,149.8 P1.4
USART1_RX: P1.3 SERIAL.2 U4.30 | length 22.6
  Component Side w0.254: U4.30 54.675,151.895 v1(54.675,151.8) ; v1(57.575,149.025) 57.6,149 P1.3
  Solder Side w0.254: v1(46.375,138.425) 46.375,141.138 52.333,147.096 55.196,147.096 56.175,148.075 56.175,149.025 ; v1(54.675,151.8) 55.2,151.275 55.2,150 56.175,149.025 ; v1(57.575,149.025) 56.175,149.025
USART1_TX: P1.2 SERIAL.3 U4.29 | length 23.2
  Component Side w0.254: U4.29 54.324,151.248 54.474,151.248 54.522,151.2 54.547,151.2 54.597,151.15 v1(54.7,151.15) ; v1(55.275,147.775) 57.2,147.775 57.625,148.2 P1.2
  Solder Side w0.254: v1(45.125,138.425) 45.125,140.355 52.197,147.426 54.901,147.426 55.845,148.37 55.845,148.78 54.7,149.925 v1(54.7,151.15)
VDD_3V3: C5.2 C6.1 C7.1 C10.1 C11.1 C14.2 C15.1 C17.2 C18.2 C19.2 C20.2 P1.1 U1.4 U2.2 U3.5 U4.1 U4.5 U4.17 UWB1.5 UWB1.6 UWB1.7 | length 51.5
  Component Side w0.127: U1.4 49.637,144.087 C11.1 ; C15.1 50.025,145.175 C11.1 ; v1(51.65,145) 51.475,144.825 C11.1 ; U4.1 53.605,153.495 53.915,153.185 55.096,153.185 55.378,152.903 ; v1(56.025,153.025) 55.903,152.903 55.378,152.903 ; C18.2 56.054,152.227 55.378,152.903
  Component Side w0.254: C5.2@41.325,167.625 C5.2 ; 41.375,165.2 UWB1.7 ; 41.375,166.6 UWB1.6 ; C5.2@41.725,168 UWB1.5 ; v1(43.475,152.8) U2.2 ; v1(49.625,148.645) 49.625,148.1 C15.1 50.078,147.753 U4.17 ; U4.5 51.578,154.453 C20.2 ; v1(54.9,141.7) 55.275,142.075 U3.5@55.275,142.26 ; v1(58.425,146.675) 58.425,147.375 P1.1
  Solder Side w0.127: v1(51.65,145) 51.65,144.95 v1(54.9,141.7)
  Solder Side w0.254: v1(49.625,148.645) 49.625,151.525 51.125,153.025 v1(56.025,153.025) ; 51.012,153.137 51.012,153.437 v1(51.625,154.05) ; v1(54.9,141.7) 55.8,142.6 57.4,142.6 58.425,143.625 v1(58.425,146.675)
pads on no net: SERIAL.4 SERIAL.5 TOF1.7 TOF1.8 U1.5 U2.6 U4.12 U4.13 U4.14 U4.18 U4.25 UWB1.1 UWB1.4 UWB1.11

## Polygon pours and split planes (outlines as drawn)
NetC8_1 on Component Side "NETC8_1_L01_P007" (solid, remove dead copper, pour order 7): 54.5,137.475 54.6,137.575 54.6,144.825 53.575,144.825 53.55,144.85 53.55,141.875 45.875,141.875 44.775,142.975 39.175,142.975 39.175,141.7 39.625,141.25 44.575,141.25 46.05,139.775 46.775,139.775 46.775,137.85 47.525,137.1 54.15,137.1
VDD_3V3 on Component Side "VDD_3V3_L01_P003" (solid, remove dead copper, pour order 3): 52.2,143.725 52.2,148.875 49.625,148.875 49.625,146.3 43.8,146.3 43.8,168.675 40.15,168.675 40.15,144.625 44.425,144.625 44.425,143.65 52.225,143.65
GND_MCU on Component Side "GND_MCU_L01_P005" (solid, remove dead copper, pour order 5): 45.45,174.625 45.45,162.775 55.75,162.775 55.75,174.775 60.95,174.775 60.95,133.225 38.4,133.225 38.4,174.625
GND_MCU on Solder Side "GND_MCU_L02_P001" (solid, remove dead copper, pour order 1): 38.575,174.8 60.875,174.8 60.875,133.275 38.5,133.275 38.5,174.775

## Silkscreen, mask and mechanical layers (free items; w line width, h text height)
Top Overlay:
  lines w0.254: 53.725,154.025 57.5,154.025 57.525,154.025 57.975,154.475
Dimension:
  the board outline again, w0.254
tCAD:
  drawing of 196 lines, arcs and shapes, not listed
  text "Layer" at 72.6,137.185 h1.52
  text "Name" at 78.969,137.185 h1.52
  text "Material" at 92.023,137.185 h1.52
  text "Thickness" at 103.087,137.185 h1.52
  text "Constant" at 112.174,137.185 h1.52
  text "Board Layer Stack" at 120.589,137.185 h1.52
  text "1" at 72.6,134.137 h1.52
  text "Top Overlay" at 78.969,134.137 h1.52
  text "2" at 72.6,131.089 h1.52
  text "Top Solder" at 78.969,131.089 h1.52
  text "Solder Resist" at 92.023,131.089 h1.52
  text "0.010mm" at 103.087,131.089 h1.52
  text "3.5" at 112.174,131.089 h1.52
  text "3" at 72.6,128.041 h1.52
  text "Component Side" at 78.969,128.041 h1.52
  text "Copper" at 92.023,128.041 h1.52
  text "0.036mm" at 103.087,128.041 h1.52
  text "4" at 72.6,124.993 h1.52
  text "Dielectric 1" at 78.969,124.993 h1.52
  text "FR-4" at 92.023,124.993 h1.52
  text "0.127mm" at 103.087,124.993 h1.52
  text "4.2" at 112.174,124.993 h1.52
  text "5" at 72.6,121.945 h1.52
  text "Signal Layer 1" at 78.969,121.945 h1.52
  text "Copper" at 92.023,121.945 h1.52
  text "0.036mm" at 103.087,121.945 h1.52
  text "6" at 72.6,118.897 h1.52
  text "Dielectric 3" at 78.969,118.897 h1.52
  text "0.640mm" at 103.087,118.897 h1.52
  text "4.2" at 112.174,118.897 h1.52
  text "7" at 72.6,115.849 h1.52
  text "Signal Layer 2" at 78.969,115.849 h1.52
  text "Copper" at 92.023,115.849 h1.52
  text "0.036mm" at 103.087,115.849 h1.52
  text "8" at 72.6,112.801 h1.52
  text "Dielectric 2" at 78.969,112.801 h1.52
  text "0.160mm" at 103.087,112.801 h1.52
  text "4.2" at 112.174,112.801 h1.52
  text "9" at 72.6,109.753 h1.52
  text "Solder Side" at 78.969,109.753 h1.52
  text "Copper" at 92.023,109.753 h1.52
  text "0.036mm" at 103.087,109.753 h1.52
  text "10" at 72.6,106.705 h1.52
  text "Bottom Solder" at 78.969,106.705 h1.52
  text "Solder Resist" at 92.023,106.705 h1.52
  text "0.010mm" at 103.087,106.705 h1.52
  text "3.5" at 112.174,106.705 h1.52
  text "11" at 72.6,103.657 h1.52
  text "Bottom Overlay" at 78.969,103.657 h1.52
Drill Drawing:
  lines w0.254: 75.487,155.283 76.609,155.283 76.609,156.405 75.487,156.405 75.487,155.283
  lines w0.381: 74.455,154.526 228.706,154.526 ; 74.455,157.05 228.706,157.05 ; 81.993,152.003 81.993,159.573 ; 88.95,152.003 88.95,159.573 ; 101.728,152.003 101.728,159.573 ; 107.635,152.003 107.635,159.573 ; 116.408,152.003 116.408,159.573 ; 136.218,152.003 136.218,159.573 ; 143.338,152.003 143.338,159.573 ; 152.756,152.003 152.756,159.573 ; 163.135,152.003 163.135,159.573 ; 172.595,152.003 172.595,159.573 ; 187.515,152.003 187.515,159.573 ; 202.025,152.003 202.025,159.573 ; 212.119,152.003 212.119,159.573 ; 74.455,152.003 228.706,152.003 228.706,159.573 74.455,159.573 74.455,152.003
  text "Symbol" at 75.969,157.807 h1.83
  text "Count" at 82.75,157.807 h1.83
  text "Hole Size" at 89.707,157.807 h1.83
  text "Plated" at 102.485,157.807 h1.83
  text "Hole Type" at 108.392,157.807 h1.83
  text "Drill Layer Pair" at 117.165,157.807 h1.83
  text "Via/Pad" at 136.975,157.807 h1.83
  text "Pad Shape" at 144.095,157.807 h1.83
  text "Template" at 153.513,157.807 h1.83
  text "Description" at 163.892,157.807 h1.83
  text "Hole Tolerance (+)" at 173.352,157.807 h1.83
  text "Hole Tolerance (-)" at 188.272,157.807 h1.83
  text "Hole Length" at 202.782,157.807 h1.83
  text "Routed Path Length" at 212.876,157.807 h1.83
  text "180" at 82.75,155.283 h1.52
  text "0.200mm (7.87mil)" at 89.707,155.283 h1.52
  text "PTH" at 102.485,155.283 h1.52
  text "Round" at 108.392,155.283 h1.52
  text "Component Side - Solder Side" at 117.165,155.283 h1.52
  text "Via" at 136.975,155.283 h1.52
  text "Rounded" at 144.095,155.283 h1.52
  text "v40h20m0mx0" at 153.513,155.283 h1.52
  text "-" at 202.782,155.283 h1.52
  text "-" at 212.876,155.283 h1.52
  text "180 Total" at 82.75,152.76 h1.52